# EAGLE board iPot (EAGLE 9.5.1)
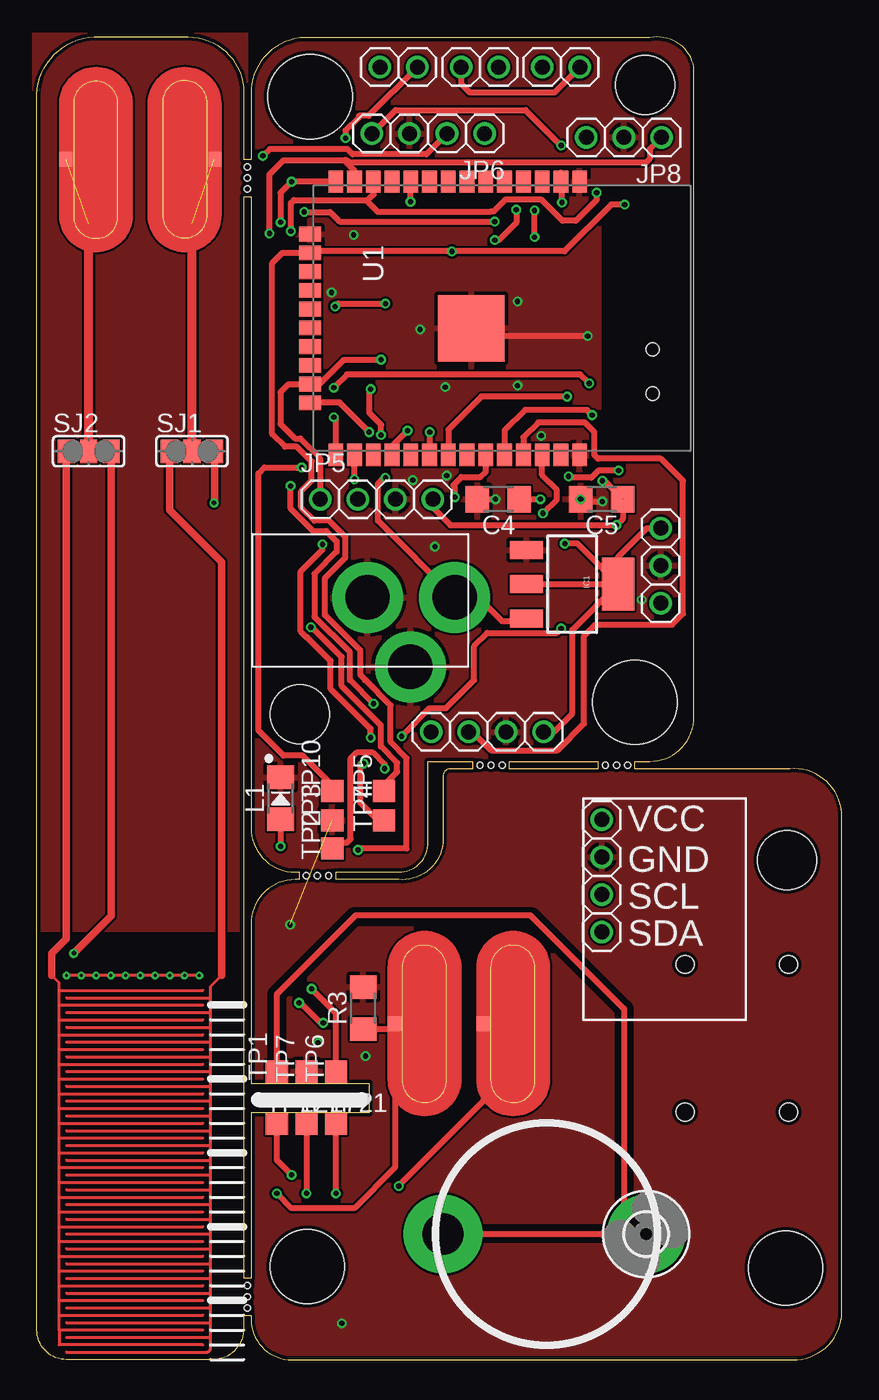
[diagram p0: board, top side]
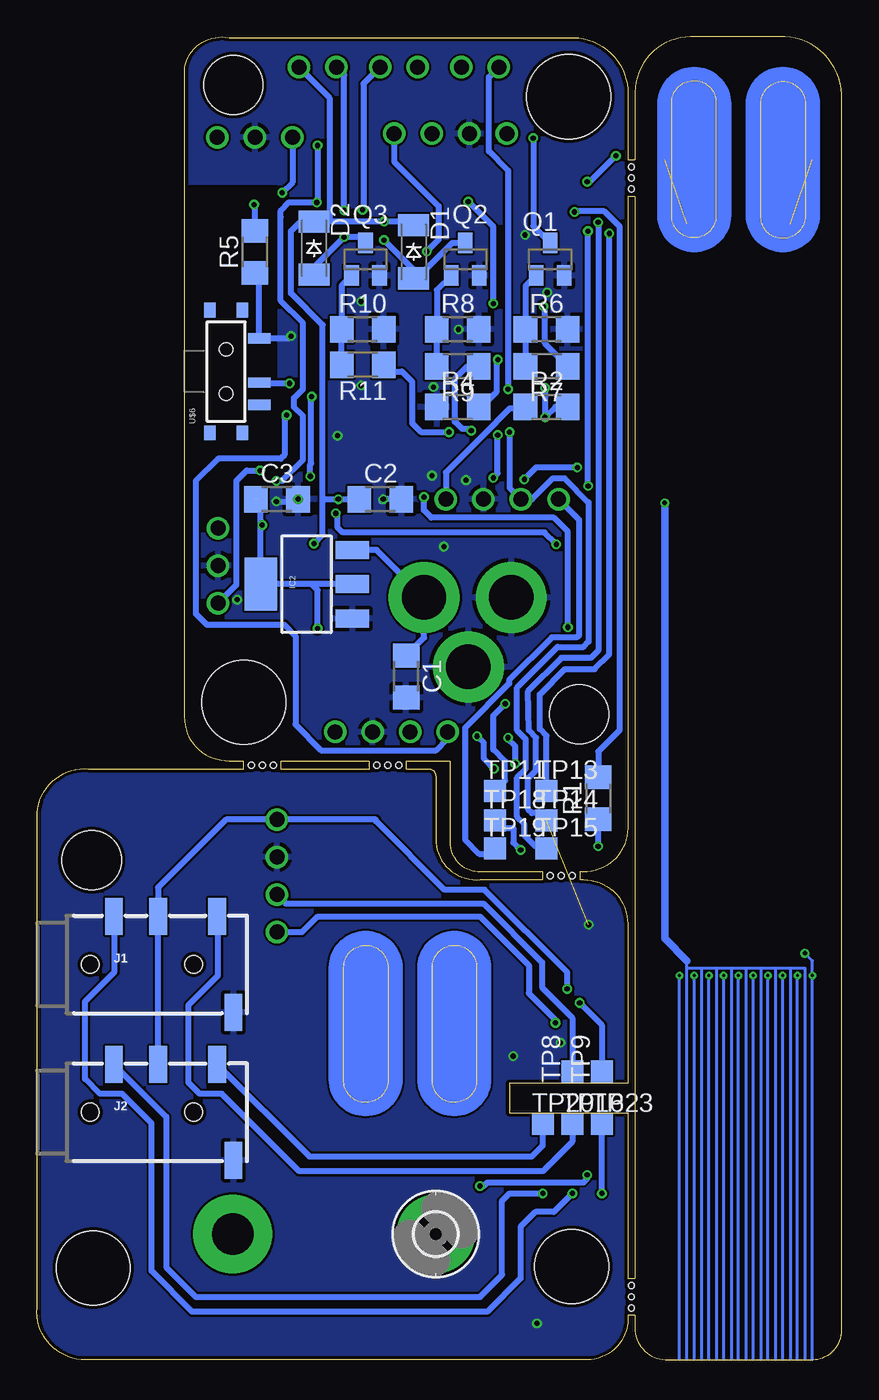
[diagram p1: board, bottom side, seen from below]

Size 54.51 x 89.55 mm. Coordinates in mm from the lower left corner, seen from the top.
Outline: 18.5,89.5 arc90 14.5,86 14.5,81.25 14,81.25 14,85.8 arc90 10.25,89.55 4.25,89.55 arc90 0,85.68 0,2 arc90 2,0 11.75,0 arc90 14,1.95 14,3 14.5,3 arc90 17,0 51.5,0 arc90 54.5,3.5 54.5,37 arc90 51,40 40.5,40 40.5,40.5 41.5,40.5 arc90 44.5,43.5 44.5,87.5 arc90 41.5,89.5 18.5,89.5
Outline: 14,78.75 14.5,78.75 14.5,36 arc90 17.5,33 17.75,33 17.75,32.5 17.5,32.5 arc90 14.5,29.5 14.5,18.7 22.5,18.7 22.5,16.7 14.5,16.7 14.5,5.5 14,5.5 14,78.75
Outline: 20.25,33 24.5,33 arc90 26.5,35 26.5,40.5 29.5,40.5 29.5,40 28,40 arc90 27.5,39.5 27.5,35 arc-90 24.5,32.5 20.25,32.5 20.25,33
Outline: 32,40.5 38,40.5 38,40 32,40 32,40.5
Copper layers (1*16): Top 0.035mm / dielectric 1.5mm / Bottom 0.035mm
Design rules "SeeedStudio_2layer_DRU_no_angle_20140221": minimum track width 6mil, minimum drill 12mil, track to track 6mil, track to pad 6mil, pad to pad 6mil, via to via 6mil, smd to smd 0mil, copper to edge 10mil, drill to drill 10mil, minimum pad ring 10mil, minimum via ring 6mil, stop-mask expansion 2mil, vias tented up to drill 100mil, thermal gap 10mil
Holes 0.4 mm at 30,40.25 30.75,40.25 31.5,40.25 38.5,40.25 39.25,40.25 40,40.25 19.75,32.75 18.25,32.75 19,32.75 14.25,3.5 14.25,4.25 14.25,5 14.25,79.25 14.25,80 14.25,80.75
Holes 5.7 mm at 18.5,85.5 40.5,44.5
Holes 5 mm at 18.3,6.3 50.7,6.2
Holes 4 mm at 50.8,33.8 17.8,43.7 41.2,86.3
tRestrict: 7 lines

## Footprints (pad centres in the part's own frame; a part is rotated, then mirrored left to right if it is on the bottom)
1206 = smd 1.6 x 1.803: 1 -1.422,0; 2 1.422,0
SOD-123_MINI-SMA = smd 1.5 x 2.1: A 1.8,0; C -1.8,0
2,8-PAD = drill 2.8 pad 5.334: B2,8 0,0
SOT223 = smd 1.219 x 2.235: 1 -2.311,-3.099; 2 0,-3.099; 3 2.311,-3.099 | smd 3.6 x 2.2: 4 0,3.099
AUDIO_JACK_3.5MM_TRRS_SMD_RA = smd 1.2 x 2.5: EARTH 11.3,-3.25; RING1 6.2,3.25; RING2 3.2,3.25; TIP 10.2,3.25 | hole 1.2: 1.6,0; 8.6,0
1X04 = drill 1.016: 1 -3.81,0; 2 -1.27,0; 3 1.27,0; 4 3.81,0
1X03 = drill 1.016: 1 -2.54,0; 2 0,0; 3 2.54,0
1X02 = drill 1.016: 1 -1.27,0; 2 1.27,0
LED1206 = smd 1.6 x 1.803: A -1.422,0; C 1.422,0
SOT23 = smd 1 x 1.4: 1 -0.95,-1.1; 2 0.95,-1.1; 3 0,1.1
SJ_2 = smd 1.168 x 1.6: 1 -1.524,0; 2 0,0; 3 1.524,0
TP15SQ = smd 1.5 x 1.5: TP 0,0
ESP-32S = smd 1.5 x 1: 1 -9.25,7; 2 -9.25,5.73; 3 -9.25,4.46; 4 -9.25,3.19; 5 -9.25,1.92; 6 -9.25,0.65; 7 -9.25,-0.62; 8 -9.25,-1.89; 9 -9.25,-3.16; 10 -9.25,-4.43; 11 -9.25,-5.7; 12 -9.25,-6.97; 13 -9.25,-8.24; 14 -9.25,-9.51; 25 9.25,-9.51; 26 9.25,-8.24; 27 9.25,-6.97; 28 9.25,-5.7; 29 9.25,-4.43; 30 9.25,-3.16; 31 9.25,-1.89; 32 9.25,-0.62; 33 9.25,0.65; 34 9.25,1.92; 35 9.25,3.19; 36 9.25,4.46; 37 9.25,5.73; 38 9.25,7 | smd 1 x 1.5: 15 -5.7,-11.25; 16 -4.43,-11.25; 17 -3.16,-11.25; 18 -1.89,-11.25; 19 -0.62,-11.25; 20 0.65,-11.25; 21 1.92,-11.25; 22 3.19,-11.25; 23 4.46,-11.25; 24 5.73,-11.25 | smd 4.5 x 4.5: GND 0.68,-0.33
PJ-102A = drill 3 pad 4.8: RING 0.1,-3.39; RING_SW -4.6,-6.29; TIP 0.1,-9.29
OVAL_HOLE = smd 1 x 1: P$2 -2,0
KPS-1290 = smd 0.7 x 1.5: O -2.25,2.25; P 0.75,2.25; S 2.25,2.25 | smd 1 x 0.8: P$1 -4.15,1.1; P$2 -4.15,-1.1; P$3 4.15,-1.1; P$4 4.15,1.1 | hole 0.9: -1.5,0; 1.5,0

## Placement (x,y rotation side)
C1  100uF  [1206]  29.5,46.25 270 bottom
C2  100nF  [1206]  31.25,58.25 0 bottom
C3  100nF  [1206]  38.25,58.25 0 bottom
C4  22uF  [1206]  31.25,58.25 180 top
C5  22uF  [1206]  38.25,58.25 180 top
D1  CGRM4002-G  [SOD-123_MINI-SMA]  29,75 270 bottom
D2  CGRM4002-G  [SOD-123_MINI-SMA]  35.75,75.25 270 bottom
H1  MOUNT-PAD-ROUND2.8  [2,8-PAD]  27.5,8.5 180 bottom
H2  MOUNT-PAD-ROUND2.8  [2,8-PAD]  41.25,8.5 180 top
IC1  LM1117-5.0  [SOT223]  36.25,52.5 270 top
IC2  LM1117-3.3  [SOT223]  36.25,52.5 90 bottom
J1  AUDIO_JACK_TRRSSMD_RA  [AUDIO_JACK_3.5MM_TRRS_SMD_RA]  52.5,26.75 0 bottom
J2  AUDIO_JACK_TRRSSMD_RA  [AUDIO_JACK_3.5MM_TRRS_SMD_RA]  52.5,16.75 0 bottom
JP1  Serial  [1X04]  30.5,42.5 0 top
JP4  RGB  [1X03]  42.25,53.75 90 top
JP5  Pot1  [1X04]  23,58.25 0 top
JP6  Pot2  [1X04]  26.5,83 180 top
JP7  BME280  [1X04]  38.25,32.75 90 top
JP8  Water Tank  [1X03]  39.75,82.75 180 top
JP9  Pump1  [1X02]  30,87.5 180 top
JP10  Pump2  [1X02]  35.5,87.5 0 top
JP11  LED  [1X02]  24.5,87.5 180 top
L1  Green  [LED1206]  16.5,38 90 top
Q1  [SOT23]  19.75,74.5 0 bottom
Q2  [SOT23]  25.5,74.5 0 bottom
Q3  [SOT23]  32.25,74.5 0 bottom
R1  470  [1206]  16.5,38 90 bottom
R2  10k  [1206]  20,64.5 0 bottom
R3  10k  [1206]  22.1,23.8 90 top
R4  10k  [1206]  26,64.5 0 bottom
R5  10k  [1206]  39.75,75 90 bottom
R6  10k  [1206]  20,69.75 0 bottom
R7  100  [1206]  20,67.25 180 bottom
R8  10k  [1206]  26,69.75 0 bottom
R9  100  [1206]  26,67.25 180 bottom
R10  10k  [1206]  32.45,69.75 0 bottom
R11  100  [1206]  32.45,67.35 180 bottom
SJ1  [SJ_2]  10.5,61.5 0 top
SJ2  [SJ_2]  3.5,61.5 0 top
TP1  TPTP15SQ  [TP15SQ]  16.25,19.5 90 top
TP2  TPTP15SQ  [TP15SQ]  20,34.6 90 top
TP3  TPTP15SQ  [TP15SQ]  20,36.5 90 top
TP4  TPTP15SQ  [TP15SQ]  23.5,36.5 90 top
TP5  TPTP15SQ  [TP15SQ]  23.5,38.5 90 top
TP6  TPTP15SQ  [TP15SQ]  20.25,19.5 90 top
TP7  TPTP15SQ  [TP15SQ]  18.25,19.5 90 top
TP8  TPTP15SQ  [TP15SQ]  18.25,19.5 90 bottom
TP9  TPTP15SQ  [TP15SQ]  16.25,19.5 90 bottom
TP10  TPTP15SQ  [TP15SQ]  20,38.5 90 top
TP11  TPTP15SQ  [TP15SQ]  23.5,38.5 0 bottom
TP12  TPTP15SQ  [TP15SQ]  16.25,15.95 0 top
TP13  TPTP15SQ  [TP15SQ]  20,38.5 0 bottom
TP14  TPTP15SQ  [TP15SQ]  20,36.5 0 bottom
TP15  TPTP15SQ  [TP15SQ]  20,34.6 0 bottom
TP16  TPTP15SQ  [TP15SQ]  18.25,15.95 0 bottom
TP17  TPTP15SQ  [TP15SQ]  18.25,15.95 0 top
TP18  TPTP15SQ  [TP15SQ]  23.5,36.5 0 bottom
TP19  TPTP15SQ  [TP15SQ]  23.5,34.6 0 bottom
TP20  TPTP15SQ  [TP15SQ]  20.25,15.95 0 bottom
TP21  TPTP15SQ  [TP15SQ]  20.25,15.95 0 top
TP23  TPTP15SQ  [TP15SQ]  16.25,15.95 0 bottom
U1  ESP-32S  [ESP-32S]  29.75,70.5 270 top
U$1  2.1MMJACKTHM  [PJ-102A]  19,51.5 90 top
U$2  OVAL_3MM_HOLE  [OVAL_HOLE]  32.25,22.75 0 top
U$3  OVAL_3MM_HOLE  [OVAL_HOLE]  26.25,22.75 0 top
U$4  OVAL_3MM_HOLE  [OVAL_HOLE]  4,81.25 0 top
U$5  OVAL_3MM_HOLE  [OVAL_HOLE]  10,81.25 180 top
U$6  SWITCH_SPDT  [KPS-1290]  41.7,66.9 270 bottom

## Library data of the parts
C1-C5 L1 R1-R11 = SpaceDIY_passive_components
D1 D2 = diode
H1 H2 = holes
IC1 IC2 = SparkFun
J1 J2 = SparkFun-Connectors; PROD_ID: CONN-10676; SF_ID: PRT-12639
JP1 JP4-JP11 U$2-U$5 = SpaceDIY_connectors
Q1-Q3 U$1 = adafruit
SJ1 SJ2 = jumper
TP1-TP21 TP23 = testpad
U1 = esp32
U$6 = SparkFun-Retired; PROD_ID: SWCH-10651

## Nets
3V3: C3.1 C5.1 IC2.2 IC2.4 JP5.4 JP6.4 R2.1 TP2.TP U1.2
3V3_W: SJ2.2 U$4.P$2
5V: C2.1 C4.1 D1.C D2.C IC1.2 IC1.4 JP1.4 JP4.3 JP9.2 JP10.2 R1.2
12V: C1.1 IC1.3 IC2.3 JP11.2 U$1.TIP
CLK: U1.20
CMD: U1.19
EN: U1.3
GND: C1.2 C2.2 C3.2 C4.2 C5.2 IC1.1 IC2.1 J1.EARTH J2.EARTH JP1.3 JP4.2 JP5.3 JP6.3 JP7.3 JP8.2 L1.C Q1.2 Q2.2 Q3.2 R3.2 R4.1 R5.1 R6.2 R8.2 R10.2 TP3.TP TP7.TP U1.1 U1.15 U1.38 U1.GND U$1.RING U$1.RING_SW U$6.O
IN_B: SJ2.3
IN_T: SJ2.1
IO0: R2.2 U1.25 U$6.P
IO2: JP5.2 TP15.TP U1.24
IO4: TP10.TP U1.26
IO5: U1.29
IO12: JP6.2 TP14.TP U1.14
IO13: JP6.1 R5.2 TP18.TP U1.16
IO14: JP8.1 TP13.TP U1.13
IO15: JP5.1 R4.2 TP19.TP U1.23
IO16: U1.27
IO17: R9.1 U1.28
IO18: R11.1 U1.30
IO19: JP4.1 U1.31
IO21: TP5.TP U1.33
IO22: TP4.TP U1.36
IO23: U1.37
IO25: R7.1 U1.10
IO26: U1.11
IO27: JP8.3 TP11.TP U1.12
IO32: U1.8
IO33: U1.9
IO34: U1.6
IO35: U1.7
LD1: JP11.1 Q1.3
M1: D1.A JP9.1 Q2.3
M2: D2.A JP10.1 Q3.3
N$1: L1.A R1.1
N$6: Q1.1 R6.1 R7.2
N$7: Q2.1 R8.1 R9.2
N$8: Q3.1 R10.1 R11.2
OUT_B: SJ1.3
OUT_T: SJ1.1
OUT_W: SJ1.2 U$5.P$2
RX: JP1.1 U1.34
S2: J2.TIP TP20.TP
S3V3: J1.RING1 J2.RING1 JP7.4 TP6.TP
S12: J1.TIP TP16.TP
S13: J1.RING2 TP17.TP
S14: TP12.TP U$2.P$2
S15: J2.RING2 TP21.TP
S27: R3.1 TP23.TP U$3.P$2
SD0: U1.21
SD1: U1.22
SD2: U1.17
SD3: U1.18
SSCL: JP7.2 TP8.TP
SSDA: JP7.1 TP9.TP
SVN: U1.5
SVP: U1.4
TOUCH: H1.B2,8 H2.B2,8 TP1.TP
TX: JP1.2 U1.35

## Tracks (layer width: path | path; a pad name or v marks a point on that pad's centre or on a via)
3V3  (via drill 0.35)  (1 unrouted)
  Top 0.406: JP5.4 26.81,57.69 28,56.5 v39.25,56.5 39.67,56.93 C5.1 38.42,59.5 v38.3,59.5 | TP2.TP 20.4,35 21,35 21.25,35.25 21.25,40.7 21.65,41.1 22.75,41.1 23.55,40.3 v23.55,40 | v24.7,42.2 26.6,44.1 27.7,44.1 29.6,46 29.6,48.3 30.5,49.2 35.2,49.2 v35.5,49.5 | 35.48,80.38 35.48,80 | 35.48,80 U1.2 | JP6.4 24.29,84.6 33.1,84.6 v35.5,82.2 | v35.55,78.35 35.55,79.93 35.48,80
  Bottom 0.406: IC2.2 35.9,52.5 | 35.9,52.5 IC2.4 39.35,57.93 C5.1 | v24.7,42.2 24.25,41.75 24.25,40.7 v23.55,40 | v35.5,49.5 35.5,52.1 35.9,52.5 | v38.3,59.5 37.9,59.5 36.5,60.9 36.5,63.9 37.1,64.5 37.1,65.1 36.5,65.7 36.5,70.2 37.99,71.7 37.99,77.37 38,77.38 38,77.8 37.45,78.35 v35.55,78.35 35.6,78.4 35.5,78.5 v35.5,82.2 | R2.1 21.52,64.4 22.5,64.4 23.42,63.48 23.42,63.46 26.81,60.07 JP5.4
3V3_W  (1 unrouted)
  Top 0.61: SJ2.2 3.5,76.88
5V  (via drill 0.35)
  Top 0.406: IC1.2 IC1.4 | IC1.4 39.35,54.35 41.29,56.29 JP4.3 | IC1.4 36.6,55.25 v35.75,55.25 | IC1.4 36.25,49.41 36.25,43.75 35,42.5 JP1.4 | v18.1,77.7 19.85,77.7 20.5,77.05 v31,77.05 | JP9.2 28.73,86.37 29.3,85.8 35.07,85.8 JP10.2 | C4.1 v34.1,58.25
  Bottom 0.406: v35.75,55.25 35.15,55.85 35.15,58.25 | 35.15,58.25 v34.1,58.25 C4.1 | R1.2 16.5,41.16 15.04,42.62 15.04,76.71 16.09,77.75 18.05,77.75 v18.1,77.7 | D1.C 29.25,77.05 v31,77.05 34.7,77.05 | 34.7,77.05 D2.C 35.8,77.1 36.6,77.1 37.3,76.4 37.3,72.2 35.15,70.05 35.15,58.25 | JP10.2 34.7,85.43 34.7,77.05
12V  (via drill 0.35)
  Top 0.406: IC1.3 32.96,50 31.5,50 29.9,51.6 U$1.TIP 23.1,56.79 23.1,59.3 23.5,59.7 v23.6,59.7 | v23.31,62.6 23.31,63.3 22.51,64.1 22.51,65.61 v22.6,65.7
  Bottom 0.406: IC2.3 31.5,54.82 U$1.TIP 28.29,48.89 C1.1 | v23.6,59.7 23.31,60 v23.31,62.6 | JP11.2 23.9,86.83 23.9,81.8 22.6,80.5 v22.6,65.7
CAP
  pour Top: 11.75,0.75 arc-90 11.5,0.5
GND  (via drill 0.35)  (1 unrouted)
  Top 0.406: v37.3,69.3 29.94,69.3 U1.GND | C4.2 v31.05,58.25 | C5.2 36.98,58.1 v38.3,58.1
  Bottom 0.406: R5.1 39.45,73.28 U$6.O 37.45,69.15 v37.3,69.3 | C4.2 v31.05,58.25 31.2,58.1 | v38.3,58.1 36.98,58.1 C5.2
  other vias: 19.05,21.45 27.65,65.85 32.55,65.95 25.95,69.75 32.55,71.65 19.95,72.25 21.45,76.15 27.75,59.85 25.45,59.55 26.95,55.05 36.83,58.25 40.95,51.45 34.15,62.55 20.65,2.45 17.15,29.45 22.25,20.55
  pour Top: -0.25,89.8 14.25,89.8 14.25,29 -0.25,29
  pour Top: 14.5,89.5 44.5,89.5 44.5,40.5 26.75,40.5 26.75,33 14.5,33
  pour Top: 14.5,32.75 25,32.75 arc90 27.25,35 27.25,40 54.75,40 54.75,-0.25 14.5,-0.25
  pour Bottom: 54.75,40 27.25,40 27.25,35 arc-90 25,32.75 14.5,32.75 14.5,-0.25 54.75,-0.25
  pour Bottom: 14.5,33 26.75,33 26.75,40.5 44.5,40.5 44.5,89.5 14.5,89.5
IN_B  (via drill 0.2, 0.3)
  Top 0.203: v11,26 v10,26 v9,26 v8,26 v7,26 v6,26 v5,26 v4,26 v3,26 v2,26
  Top 0.508: SJ2.3 5.02,30.03 v2.5,27.5
  Bottom 0.203: 2,0 v2,26 2,27 v2.5,27.5 | 3,0 v3,26 | 4,0 v4,26 | 5,0 v5,26 | 6,0 v6,26 | 7,0 v7,26 | 8,0 v8,26 | 9,0 v9,26 | 10,0 v10,26 | 11,0 v11,26
IN_T
  Top 0.2: 11.25,2 1.5,2 | 1.5,2 1.5,3 | 1.5,3 11.25,3 | 1.5,3 1.5,4 | 1.5,4 1.5,5 | 1.5,5 1.5,6 | 1.5,6 1.5,7 | 1.5,7 1.5,8 | 1.5,8 1.5,9 | 1.5,4 11.25,4 | 1.5,2 1.5,1 11.25,1 | 1.5,5 11.25,5 | 1.5,6 11.25,6 | 1.5,7 11.25,7 | 1.5,8 11.25,8 | 1.5,9 11.25,9 | 1.5,9 1.5,10 | 1.5,10 1.5,11 | 1.5,11 1.5,12 | 1.5,12 1.5,13 | 1.5,13 1.5,14 | 1.5,10 11.25,10 | 1.5,11 11.25,11 | 1.5,12 11.25,12 | 1.5,13 11.25,13 | 1.5,14 11.25,14 | 1.5,14 1.5,15 | 1.5,15 1.5,16 | 1.5,16 1.5,17 | 1.5,17 1.5,18 | 1.5,18 1.5,19 | 1.5,15 11.25,15 | 1.5,16 11.25,16 | 1.5,17 11.25,17 | 1.5,18 11.25,18 | 1.5,19 11.25,19 | 1.5,19 1.5,20 | 1.5,20 1.5,21 | 1.5,21 1.5,22 | 1.5,22 1.5,23 | 1.5,23 1.5,24 | 1.5,24 1.5,25 | 1.5,25 1.5,25.25 | 1.5,20 11.25,20 | 1.5,21 11.25,21 | 1.5,22 11.25,22 | 1.5,23 11.25,23 | 1.5,24 11.25,24 | 1.5,25 11.25,25
  Top 0.203: 1.5,25.25 1.5,25.5 1,26
  Top 0.508: SJ2.1 1.98,28.48 1,27.5 1,26
IO0  (via drill 0.35)
  Top 0.406: v20.1,63.8 20.24,63.66 U1.25 | v37.4,66.1 36.8,66.7 21,66.7 v20.1,65.8
  Bottom 0.406: R2.2 19.4,64.5 v20.1,63.8 v20.1,65.8 | U$6.P 39.4,66.1 v37.4,66.1
IO2  (via drill 0.35)
  Top 0.406: U1.24 18.53,64.8 20.5,64.8 v22.5,62.8
  Bottom 0.406: TP15.TP 20.15,34.75 20.75,34.75 21.5,35.5 21.5,36.25 22,36.75 22,39.4 21.4,40 21.4,42 22,42.6 22,45.5 19.25,48.25 17.5,48.25 17.15,48.6 17.15,58.04 18.78,59.67 19.55,59.67 20.97,58.25 JP5.2 22.5,59.02 v22.5,62.8
IO4  (via drill 0.35)
  Top 0.406: TP10.TP 20,38.9 18,40.9 16.7,40.9 15,42.6 15,60 15.4,60.4 v17.92,60.4 | v21.5,59.6 U1.26
  Bottom 0.406: v17.92,60.4 20.7,60.4 v21.5,59.6
IO12  (via drill 0.35)
  Top 0.406: U1.14 v17.25,79.75 16.5,79 v16.5,77 | JP6.2 26.37,81.6 21.39,81.6 21.03,81.96 15.76,81.96 v15.3,81.5
  Bottom 0.406: TP14.TP 20.5,37 21,37 21.25,37.25 21.25,39.35 20.7,39.9 20.7,42.1 21.2,42.61 21.25,45.25 19,47.5 17,47.5 16.5,48 v16.5,77 | v15.3,81.5 17.05,79.75 v17.25,79.75
IO13  (via drill 0.35)
  Top 0.406: v21.75,34.5 21.85,34.6 25.04,34.6 25.04,40.71 23.95,41.8 23.95,44.3 22.25,46 | 22.25,46 22.2,46 | 22.25,46 21.9,46.35 21.9,48 19.5,50.4 19.5,52.9 20.9,54.3 20.9,55.7 19.8,56.8 18.8,56.8 17.9,57.7 17.9,58.8 18.6,59.5 18.6,60.8 17.6,61.8 16.8,61.8 15.94,62.66 15.94,74.25 16.63,74.93 U1.16 18.6,75.03 v28.1,75.03 35.73,75.03 38.9,78.2 v39.8,78.2
  Bottom 0.406: TP18.TP 23,36 22.25,36 22.25,35 v21.75,34.5 | R5.2 39.75,78.15 v39.8,78.2 | JP6.1 30.31,81.11 27.3,78.1 27.3,75.83 v28.1,75.03
IO14  (via drill 0.35)
  Top 0.406: v15.75,76.25 15.75,80.25 16.7,81.2 20.6,81.2 20.8,81.2 | U1.13 21.51,80.49 20.8,81.2 | JP8.1 41.5,81.96 41.5,81.3 41.24,81.05 21.16,81.05 21,81.2 20.8,81.2
  Bottom 0.406: TP13.TP 20,42.24 20.46,42.69 20.46,45.05 18.75,46.75 16.75,46.75 15.75,47.75 v15.75,76.25
IO15  (via drill 0.35)
  Top 0.406: JP5.1 19.16,58.29 19.16,61.04 17.83,62.36 17.49,62.36 16.5,63.35 16.5,65.5 17.04,66.04 U1.23 19.14,66.04 20.8,67.7 v23.3,67.7
  Bottom 0.406: JP5.1 17.8,56.86 17.8,49.05 17.95,48.9 19.63,48.9 22.53,46 22.53,45.76 25.5,42.8 25.5,35.2 24.56,34.25 23.85,34.25 TP19.TP | v23.3,67.7 23.4,67.6 23.4,65.5 24.4,64.5 R4.2
IO17  (via drill 0.35)
  Top 0.406: U1.28 24.05,61.85 v25.1,62.9
  Bottom 0.406: v25.1,62.9 25.2,63 25.7,63 26.2,63.5 26.2,66.4 25.35,67.25 R9.1
IO18  (via drill 0.35)
  Top 0.406: v26.6,62.8 U1.30
  Bottom 0.406: R11.1 30.58,66.9 29.8,66.9 29.1,66.2 29.1,63.4 28.5,62.8 v26.6,62.8
IO19  (via drill 0.35)
  Top 0.406: v39.4,60.2 39.38,60.19 38.02,60.19 37.53,59.7 36,59.7 v36,59.8 | v35.9,65.2 30.1,65.2 27.86,62.96 U1.31
  Bottom 0.406: JP4.1 41,52.46 41,59.5 40.3,60.2 v39.4,60.2 | v36,59.8 36,60.61 35.94,60.67 35.94,65.16 v35.9,65.2
IO21  (via drill 0.35)
  Top 0.406: TP5.TP 23.5,38.9 24.4,39.8 24.4,40.4 23.3,41.5 23.3,42.94 20.64,45.6 20.64,47.57 18.61,49.61 18.57,49.61 v18.55,49.59 | v28.3,58.4 28.3,59.1 28.2,59.2 28.75,59.75 30.05,59.75 30.4,60.1 U1.33
  Bottom 0.406: v18.55,49.59 18.55,56.06 19.5,57 27.8,57 28.3,57.5 v28.3,58.4
IO22  (via drill 0.35)
  Top 0.406: TP4.TP 23.1,36.5 21.9,37.7 21.9,40.34 21.92,40.35 v22.12,40.35 | v22.6,42.1 22.6,42.7 19.9,45.4 19.9,47.3 18.3,48.9 18.27,48.9 17.87,49.3 17.87,53.37 19.33,54.84 v19.33,55.2 | v34.27,57.3 34.21,57.36 34.3,57.3 35.2,58.2 35.2,58.9 34.21,59.89 U1.36
  Bottom 0.406: v22.12,40.35 22.12,41.53 22.6,42.01 v22.6,42.1 | v19.33,55.2 20.13,56 33.8,56 34.17,56.37 34.17,57.2 v34.27,57.3
IO25  (via drill 0.35)
  Top 0.406: v20.2,71.3 20.4,71.5 v23.6,71.5 | v25.3,78.4 25.3,79.73 U1.10
  Bottom 0.406: R7.1 20.1,68.78 20.1,71.3 v20.2,71.3 | v23.6,71.5 23.6,76.7 v25.3,78.4
IO27  (via drill 0.35)
  Top 0.406: v22.8,44.4 21.2,46 21.2,47.9 18.78,50.32 18.8,50.34 18.8,53.2 20.3,54.7 20.3,55.4 19.59,56.11 18.7,56.11 17.18,57.62 v17.18,59.16 | v17.2,76.4 17.2,78.3 17.4,78.5 22.4,78.5 | 22.4,78.5 22.8,78.9 22.8,79.73 U1.12 | v37.9,79 37.9,78.5 36.5,77.1 35.6,77.1 34.16,78.55 31.74,78.55 30.93,77.74 30.72,77.74 30.68,77.7 23.1,77.7 22.4,78.4 22.4,78.5
  Bottom 0.406: TP11.TP 22.8,39.2 22.8,40.5 23.6,41.3 23.6,43.6 v22.8,44.4 | v17.18,59.16 17.18,76.39 v17.2,76.4 | JP8.3 37.21,79.69 v37.9,79
LD1  (via drill 0.35)
  Top 0.406: JP11.1 22.47,84.2 21.81,84.2 21.81,84.13 20.9,83.23 v20.9,82.7
  Bottom 0.406: v20.9,82.7 20.9,76.75 Q1.3
M1  (via drill 0.35)
  Top 0.406: v32.46,77.86 32.46,76.96 31.3,75.8 v31,75.8
  Bottom 0.406: JP9.1 32.4,86.37 32.4,77.92 v32.46,77.86 | v31,75.8 29,73.8 D1.A 28.8,73.2 26.4,75.6 Q2.3
M2  (via drill 0.35)
  Top 0.406: v33.7,76 v33.7,77.8
  Bottom 0.406: Q3.3 32.65,76 v33.7,76 35.75,73.95 D2.A | v33.7,77.8 33.7,86.97 JP10.1
N$1  (via drill 0.35)
  Top 0.406: L1.A v16.5,34.75
  Bottom 0.406: v16.5,34.75 L1.A
N$6
  Bottom 0.406: Q1.1 21.42,72.68 R6.1 R7.2
N$7
  Bottom 0.406: Q2.1 27.42,72.43 R8.1 R9.2
N$8
  Bottom 0.406: Q3.1 33.87,72.73 R10.1 R11.2
N$19
  Bottom 0.203: 3.5,26.5 3.5,0
N$22
  Bottom 0.203: 4.5,26.5 4.5,0
N$24
  Bottom 0.203: 5.5,26.5 5.5,0
N$26
  Bottom 0.203: 6.5,26.5 6.5,0
N$28
  Bottom 0.203: 7.5,26.5 7.5,0
N$30
  Bottom 0.203: 8.5,26.5 8.5,0
N$32
  Bottom 0.203: 9.5,26.5 9.5,0
OUT_B  (via drill 0.3)
  Top 0.508: SJ1.3 12.02,58.03 v12,58
  Bottom 0.203: 2.5,0 2.5,26.5 10.5,26.5 | 10.5,0 10.5,26.5 | 10.5,26.5 10.5,27
  Bottom 0.508: v12,58 12,28.5 10.5,27
OUT_T
  Top 0.2: 11.75,3.5 11.75,4.5 | 11.75,4.5 11.75,5.5 | 11.75,5.5 11.75,6.5 | 11.75,6.5 11.75,7.5 | 11.75,7.5 11.75,8.5 | 11.75,8.5 11.75,9.5 | 11.75,9.5 11.75,10.5 | 2,3.5 11.75,3.5 | 2,0.5 11.5,0.5 arc90 11.75,0.75 11.75,1.5 | 2,2.5 11.75,2.5 | 11.75,2.5 11.75,3.5 | 11.75,1.5 11.75,2.5 | 2,1.5 11.75,1.5 | 2,4.5 11.75,4.5 | 2,5.5 11.75,5.5 | 2,6.5 11.75,6.5 | 2,7.5 11.75,7.5 | 2,8.5 11.75,8.5 | 2,9.5 11.75,9.5 | 11.75,10.5 11.75,11.5 | 11.75,11.5 11.75,12.5 | 11.75,12.5 11.75,13.5 | 11.75,13.5 11.75,14.5 | 11.75,14.5 11.75,15.5 | 2,10.5 11.75,10.5 | 2,11.5 11.75,11.5 | 2,12.5 11.75,12.5 | 2,13.5 11.75,13.5 | 2,14.5 11.75,14.5 | 11.75,15.5 11.75,16.5 | 11.75,16.5 11.75,17.5 | 11.75,17.5 11.75,18.5 | 11.75,18.5 11.75,19.5 | 11.75,19.5 11.75,20.5 | 2,15.5 11.75,15.5 | 2,16.5 11.75,16.5 | 2,17.5 11.75,17.5 | 2,18.5 11.75,18.5 | 2,19.5 11.75,19.5 | 11.75,20.5 11.75,21.5 | 11.75,21.5 11.75,22.5 | 11.75,22.5 11.75,23.5 | 11.75,23.5 11.75,24.5 | 11.75,24.5 11.75,25 | 2,20.5 11.75,20.5 | 2,21.5 11.75,21.5 | 2,22.5 11.75,22.5 | 2,23.5 11.75,23.5 | 2,24.5 11.75,24.5
  Top 0.203: 11.75,25 11.75,25.25 12.5,26
  Top 0.508: 12.5,26 12.5,54 8.98,57.53 SJ1.1
OUT_W  (1 unrouted)
  Top 0.61: SJ1.2 10.5,76.91
RX  (via drill 0.35)
  Top 0.406: U1.34 31.67,62.92 33.05,64.3 37.25,64.3 v37.6,63.95
  Bottom 0.406: v37.6,63.95 37.75,63.8 37.75,61.25 38,61 42.25,61 43.75,59.5 43.75,50.5 43,49.75 37.75,49.75 37,49 37,43 35.25,41.25 27.5,41.25 26.69,42.06 JP1.1
S2
  Bottom 0.406: J2.TIP 36.05,13.75 21,13.75 20.25,14.5 TP20.TP
S3V3  (via drill 0.35)
  Top 0.406: TP6.TP 20.25,23.45 v18.6,25.1
  Bottom 0.406: v18.6,25.1 18.6,26.2 24.2,31.8 26.9,31.8 31.56,36.46 31.56,36.56 JP7.4 41.69,36.56 46.3,31.95 J1.RING1 J2.RING1
S12
  Bottom 0.406: TP16.TP 18.25,14.75 20.25,12.75 36.75,12.75 42,18 43.5,18 44.25,18.75 44.25,24 42.25,26 42.25,30.5 42.3,30.45 J1.TIP
S13  (via drill 0.35)
  Top 0.406: TP17.TP v18.25,11.25
  Bottom 0.406: v18.25,11.25 19.5,10 20.75,10 21.75,9 21.75,5.5 24,3.25 44,3.25 46.75,6 46.75,16 48.75,18 50.25,18 51.25,19 51.25,24.25 49.25,26.25 49.25,30.5 49.3,30.45 J1.RING2
S14  (via drill 0.35)
  Top 0.406: U$2.P$2 30.25,17.5 v24.5,11.75 | v17.25,12.5 16.25,13.5 TP12.TP
  Bottom 0.406: v24.5,11.75 24.25,11.75 24,12 17.5,12 17.25,12.25 v17.25,12.5
S15  (via drill 0.35)
  Top 0.406: v20.25,11.25 TP21.TP
  Bottom 0.406: J2.RING2 45.75,16.45 45.75,6.25 43.75,4.25 24.5,4.25 23,5.75 23,10.75 22.5,11.25 v20.25,11.25
S27  (via drill 0.35)
  Top 0.406: U$3.P$2 24.25,22.3 | 24.25,22.3 24.25,13 21.5,10.25 17.25,10.25 v16.25,11.25 | R3.1 24.17,22.38 24.25,22.3
  Bottom 0.406: v16.25,11.25 TP23.TP
SSCL
  Bottom 0.406: JP7.2 37.65,30.88 24.28,30.88 20.3,26.9 20.3,25.2 18.25,23.15 TP8.TP
SSDA  (via drill 0.35)
  Top 0.406: v19.4,22.8 19.2,22.8 17.8,24.2 v17.75,24.15
  Bottom 0.406: JP7.1 36.56,28.94 35.5,30 24.5,30 21.2,26.7 21.2,24.8 19.4,23 v19.4,22.8 | v17.75,24.15 16.25,22.65 TP9.TP
TOUCH
  Top 0.406: TP1.TP 16.25,24.75 21.6,30.1 33.4,30.1 39.75,23.75 39.75,10 H2.B2,8 H1.B2,8
TX
  Top 0.406: JP1.2 29.5,42.5 30.75,41.25 35.25,41.25 37.06,43.06 37.06,49 37.81,49.75 43,49.75 43.75,50.5 43.75,59.5 42.25,61 38,61 37.75,61.25 37.75,62.8 37.1,63.45 33.95,63.45 32.94,62.44 U1.35

## Text on the board
tPlace: VCC | GND | SCL | SDA